# Altium PCB VGA-PCB.PcbDoc
Units mm, origin at the board's own origin, x right, y up, seen from the top; angles counter-clockwise.
Board outline 40 x 30 mm, 2 copper layers (Top Layer, Bottom Layer); 12 components, 16 nets, 48 pads, 9 vias.
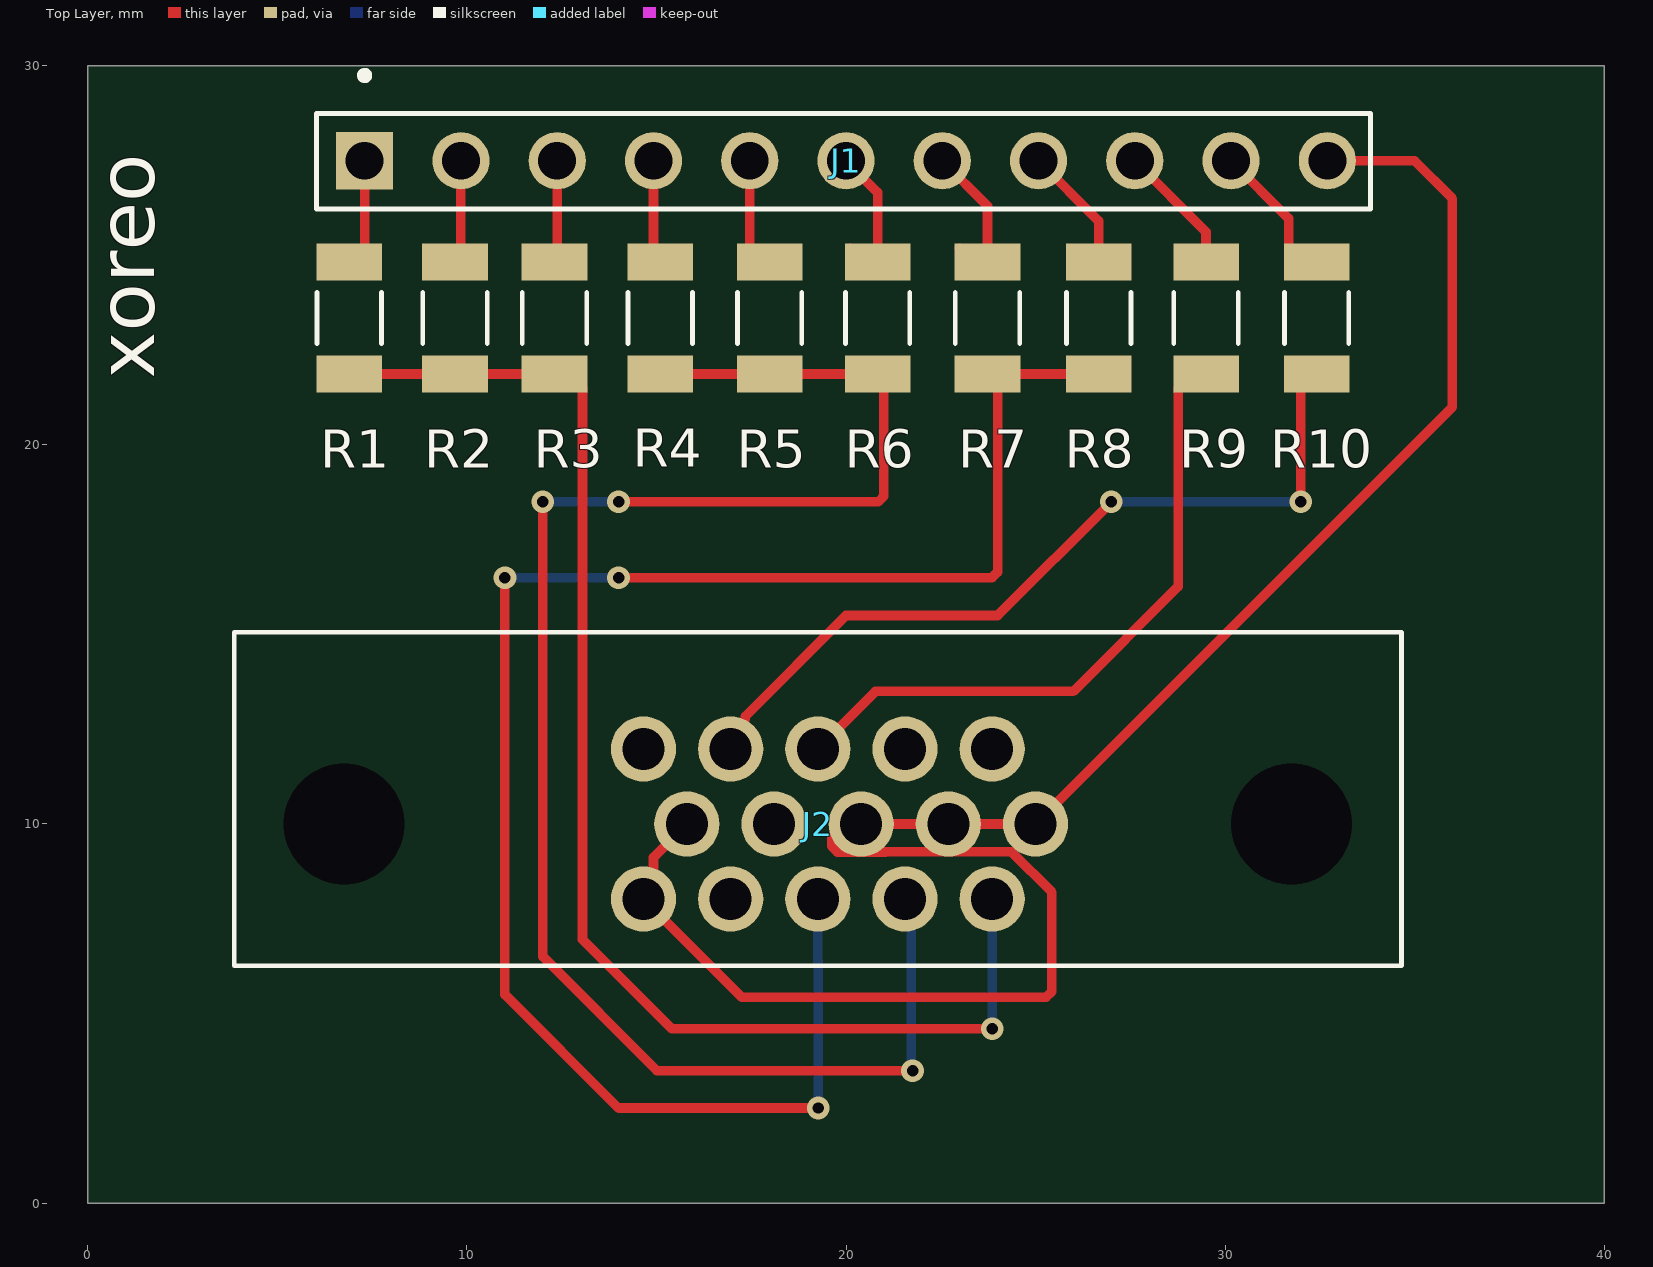
[diagram p0: Top Layer view]
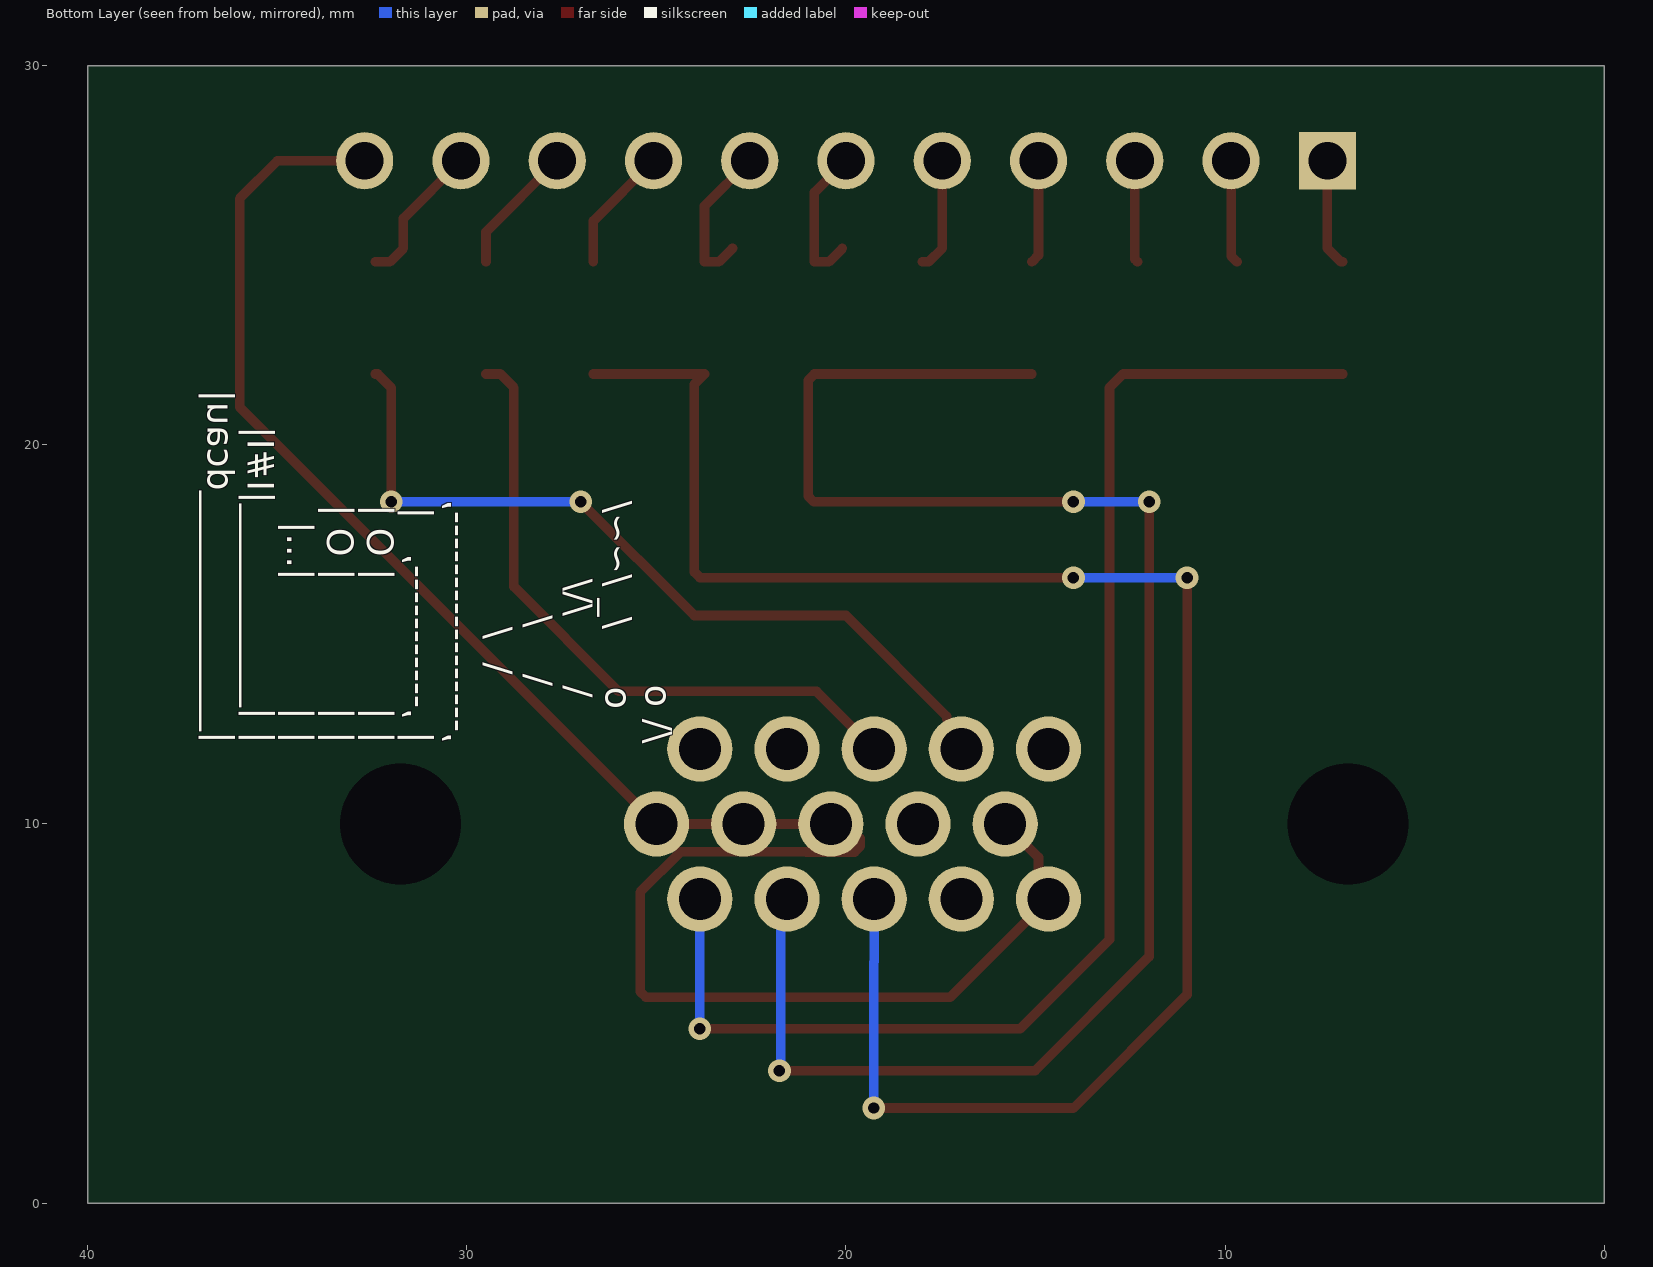
[diagram p1: Bottom Layer view, seen from below]
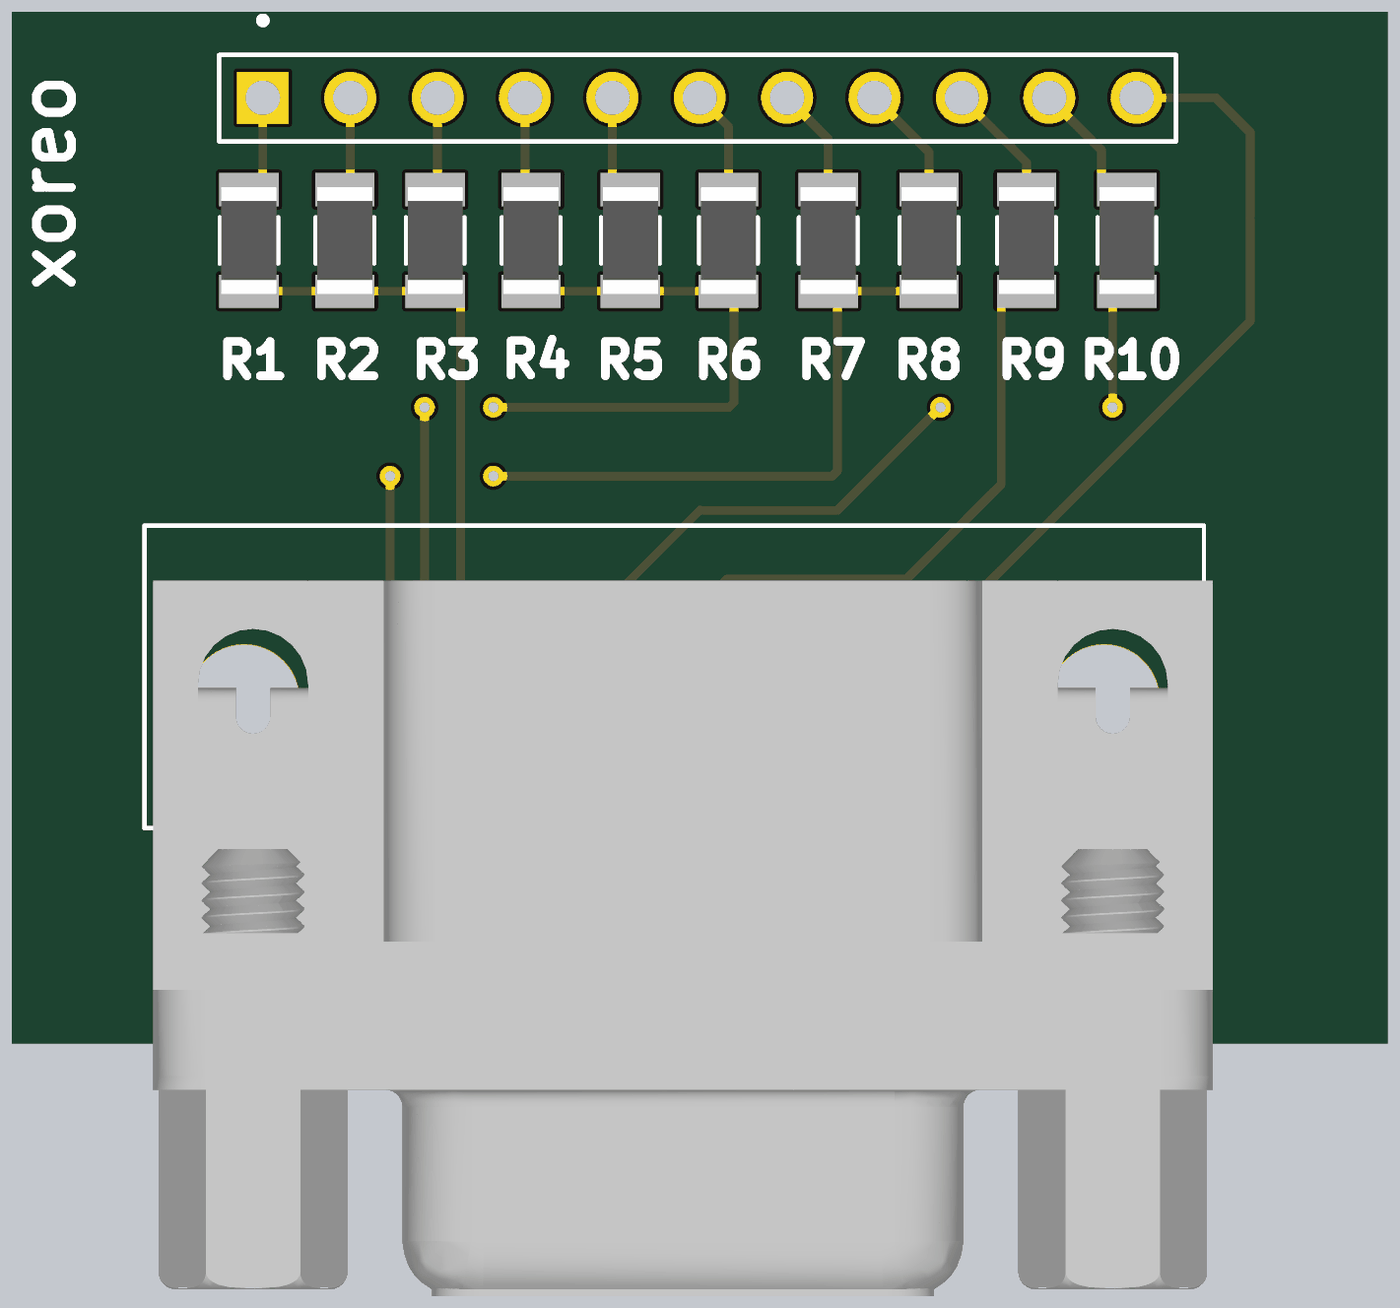
[diagram p2: 3D render of the assembled board from above, using the file's embedded part models]

## Layer stack, top to bottom
Top Solder: solder mask 0.0102, Solder Resist, Dk 3.5
Top Layer: signal copper 0.0356
Dielectric 1: dielectric 0.32, FR-4, Dk 4.8
Bottom Layer: signal copper 0.0356
Bottom Solder: solder mask 0.0102, Solder Resist, Dk 3.5

## Board outline
0,0 40,0 40,30 0,30

## Design rules (kind name [scope] priority, off if disabled: settings)
Clearance [All] p1: gap=0.254 ignorepadtopadclearanceinfootprint=FALSE except(0: Arc-Hole Track-Hole SMDPad-Hole THPad-Hole Via-Hole Fill-Hole Poly-Hole Region-Hole Text-Hole)
HoleSize [All] p1: absolutevalues=TRUE maxlimit=5 minlimit=0.025 maxpercent=80.000 minpercent=20.000
PolygonConnect [All] p1: connectstyle=Relief reliefconductorwidth=0.254 reliefentries=4 polygonreliefangle="90 Angle" airgapwidth=0.254
RoutingVias [All] p1: holewidth=0.711 width=1.27 viastyle="Through Hole" minholewidth=0.711 minwidth=1.27 maxholewidth=0.711 maxwidth=1.27
SolderMaskExpansion [All] p1: expansion=0.102 istentingtop=FALSE
Width [All] p1: maxlimit=0.254 minlimit=0.254 preferedwidth=0.254
29 further rules are at their usual default settings.

## Classes and differential pairs
component class VGA-SCH: J1 J2 R1 R2 R3 R4 R5 R6 R7 R8 R10

## Components (designator, comment, footprint, x,y, rotation, side; value= is the part's Value field where it differs from the comment)
J1 "VGA Pin HDR" "VGA HDR" 20,27.5 r0 top
J2 "Female DB15 VGA connector" "VGA CONNECTOR" 19.257,15.06 r180 top
R1 "2K" "Resistor 1206" 6.895,23.352 r270 top
R2 "1K" "Resistor 1206" 9.684,23.352 r270 top
R3 "510R" "Resistor 1206" 12.309,23.352 r270 top
R4 "2K" "Resistor 1206" 15.097,23.352 r270 top
R5 "1K" "Resistor 1206" 17.983,23.352 r270 top
R6 "510R" "Resistor 1206" 20.834,23.352 r270 top
R7 "1K" "Resistor 1206" 23.734,23.352 r270 top
R8 "510R" "Resistor 1206" 26.667,23.352 r270 top
R9 "200R" "Resistor 1206" 29.5,23.352 r270 top (schematic designator R10)
R10 "200R" "Resistor 1206" 32.417,23.352 r270 top (schematic designator R9)

## Footprints (in the part's own frame and the unit in brackets; to place one, negate y for a bottom-side part, rotate by r counter-clockwise, add the part's x,y. Pads: shape width x height; smd on the part's side, far side on the other; paste and mask are expansions set on the pad)
"Resistor 1206" [mm]
  rect 0.97x1.73 smd: 1(-1.48,0) 2(1.48,0)
  silkscreen extent -0.67,-0.85 0.67,0.85, body extent -1.55,-0.8 1.55,0.8, height 0.65
"VGA CONNECTOR" [mm]
  round 1.724 hole 1.11: 1(-4.6,7.04) 2(-2.3,7.04) 3(0,7.04) 4(2.3,7.04) 5(4.6,7.04) 6(-5.743,5.06) 7(-3.443,5.06) 8(-1.143,5.06) 9(1.157,5.06) 10(3.457,5.06) 11(-4.6,3.08) 12(-2.3,3.08) 13(0,3.08) 14(2.3,3.08) 15(4.6,3.08)
  round 0 hole 3.2: 17(-12.5,5.06) 17(12.5,5.06)
  silkscreen extent -15.4,0 15.4,8.8, body extent -15.66,1.6 15.15,22.4, height 12.77
"VGA HDR" [mm] "1x11 pin header"
  rect 1.508x1.508 hole 1: 1(-12.7,0)
  round 1.508 hole 1: 2(-10.16,0) 3(-7.62,0) 4(-5.08,0) 5(-2.54,0) 6(0,0) 7(2.54,0) 8(5.08,0) 9(7.62,0) 10(10.16,0) 11(12.7,0)
  silkscreen extent -13.97,-1.27 13.84,2.35

## Part data
J1: library part "Connector: VGA HDR", "VGA pin male header"
J2: library part "Connector: DB15 VGA"
R1 R4: library part "Resistor: 2K R", "Res Thick Film 1206 2K Ohm 1% 1/4W ±100ppm/°C Molded SMD SMD Paper T/R", Case Code (Imperial)=1206, Case Code (Metric)=3216, Manufacturer=Yageo, Manufacturer Part Number=RC1206FR-132KL, Max Operating Temperature=155°C, Min Operating Temperature=-55°C, Package Quantity=5000, Power Rating=250mW, Resistance=2kR, Resistor Type="Thick Film", Supplier Part Number 1=13-RC1206FR-132KL-ND, Temperature Coefficient=100ppm/°C, Tolerance=1%, Voltage Rating=200V, Case/Package=1206, Category="Chip SMD Resistors", ComponentLink1Description=https://datasheet.ciiva.com/16834/pyu-rc1206-51-rohs-l-4-16834793.pdf?src-supplier=Future+Electronics, ComponentLink1URL=https://datasheet.ciiva.com/16834/pyu-rc1206-51-rohs-l-4-16834793.pdf?src-supplier=Future+Electronics, Contact Plating=Tin,Matte, Height=0.55mm, Lead Free="Lead Free", Length=3.1mm, Packaging="Tape and Reel", Pricing 1="20000=0,00667 (USD)", Radiation Hardening=No, RoHS=Yes, RoHS Compliant=Yes, Series=RC, Size Code=1206, Supplier 1=Digi-Key, Termination=SMD/SMT, Width=1.6mm
R2 R5 R7: library part "Resistor: 1K R", "Res Thick Film 1206 1K Ohm 5% 1/4W ±100ppm/°C Molded SMD SMD Paper T/R", Case Code (Imperial)=1206, Case Code (Metric)=3216, Manufacturer=Yageo, Manufacturer Part Number=RC1206JR-131KL, Max Operating Temperature=155°C, Min Operating Temperature=-55°C, Power Rating=250mW, Resistance=1kR, Resistor Type="Thick Film", Supplier Part Number 1=603-RC1206JR-131KL, Temperature Coefficient=100ppm/°C, Tolerance=5%, Voltage Rating=200V, Case/Package=1206, Category="Chip SMD Resistors", ComponentLink1Description=http://www.mouser.com/ds/2/447/PYu-RC1206_51_RoHS_L-4-349080.pdf?src-supplier=Mouser, ComponentLink1URL=http://www.mouser.com/ds/2/447/PYu-RC1206_51_RoHS_L-4-349080.pdf?src-supplier=Mouser, ComponentLink2Description=http://www.yageo.com/documents/recent/PYu-RC1206_51_RoHS_L-4.pdf?src-supplier=Future+Electronics, ComponentLink2URL=http://www.yageo.com/documents/recent/PYu-RC1206_51_RoHS_L-4.pdf?src-supplier=Future+Electronics, ComponentLink3Description=http://www.yageo.com/documents/recent/PYu-RC1206_51_RoHS_L_v5.pdf?src-supplier=Avnet, ComponentLink3URL=http://www.yageo.com/documents/recent/PYu-RC1206_51_RoHS_L_v5.pdf?src-supplier=Avnet, Construction=Rectangular, Contact Plating=Tin,Matte, Depth=1.6mm, Lead Free="Lead Free", Length=3.1mm, Military Standard=Not, Packaging="Tape and Reel", Pricing 1="1=0,20000, 10=0,06700, 50=0,06700, 100=0,02800, 1000=0,01300, 10000=0,00800 (USD)", Radiation Hardening=No, RoHS=Yes, RoHS Compliant=Yes, Series=RC, Size Code=1206, Stock 1=38950, Supplier 1=Mouser, Termination=SMD/SMT
R3 R6 R8: library part "Resistor: 510R", "Res Thick Film 1206 510 Ohm 1% 1/4W ±100ppm/°C Molded SMD SMD Paper T/R", Case Code (Imperial)=1206, Case Code (Metric)=3216, Manufacturer="Vishay Dale", Manufacturer Part Number=CRCW1206510RFKEB, Max Operating Temperature=155°C, Max Power Dissipation=250mW, Min Operating Temperature=-55°C, Package Quantity=10000, Resistor Type="Thick Film", Supplier Part Number 1=CRCW1206510RFKEB-ND, Temperature Coefficient=100ppm/°C, Tolerance=1%, Voltage Rating=200V, Case/Package=1206, Category="Chip SMD Resistors", ComponentLink1Description=https://datasheet.ciiva.com/8931/dcrcwe3-8931628.pdf?src-supplier=Avnet, ComponentLink1URL=https://datasheet.ciiva.com/8931/dcrcwe3-8931628.pdf?src-supplier=Avnet, ComponentLink2Description=https://datasheet.ciiva.com/5583/dcrcwe3-109170-5583982.pdf?src-supplier=Mouser, ComponentLink2URL=https://datasheet.ciiva.com/5583/dcrcwe3-109170-5583982.pdf?src-supplier=Mouser, Contact Plating=Tin, Features="Automotive AEC-Q200", Height=0.024inch, Lead Free="Lead Free", Length=0.126inch, Number of Terminations=2, Packaging="Tape and Reel", Power Rating=250mW, Pricing 1="20000=0,00965 (USD)", Radiation Hardening=No, Resistance=510R, RoHS=Yes, RoHS Compliant=Yes, Series=CRCW, Supplier 1=Digi-Key, Termination=SMD/SMT, Weight=0.000353oz, Width=0.063inch
R9 R10: library part "Resistor: 200R", "Surface Mount Thick Film Resistor, AEC-Q200 ERJ Series, 200 ohm, 250 mW, - 1%, 200 V", Case Code (Imperial)=1206, Case Code (Metric)=3216, Current Rating=2A, Manufacturer=Panasonic, Manufacturer Part Number=ERJ-U08F2000V, Max Operating Temperature=155°C, Min Operating Temperature=-55°C, Package Quantity=5000, Power Rating=250mW, Resistance Tolerance=1%, Resistor Type="Thick Film", Supplier Part Number 1=1723988, Temperature Coefficient=100ppm/°C, Voltage Rating=200V, Case/Package=1206, Category="Chip SMD Resistors", ComponentLink1Description=https://datasheet.ciiva.com/7891/1638979-7891542.pdf?src-supplier=Element14, ComponentLink1URL=https://datasheet.ciiva.com/7891/1638979-7891542.pdf?src-supplier=Element14, ComponentLink2Description=https://datasheet.ciiva.com/24195/ras-erj-u-267552-24195551.pdf?src-supplier=Mouser, ComponentLink2URL=https://datasheet.ciiva.com/24195/ras-erj-u-267552-24195551.pdf?src-supplier=Mouser, Depth=1.6mm, Height=0.6mm, Length=3.2mm, Packaging="Tape and Reel", Pricing 1="4000=0,04900 (EUR)", Reach SVHC Compliant=Yes, Resistance=200R, RoHS=Yes, RoHS Compliant=Yes, Series=ERJ-U08, Stock 1=6900, Supplier 1=Rs, Technology="THICK FILM", Termination=SMD/SMT, Tolerance=1%, Voltage Rating (DC)=200V, Weight=0.000571oz, Width=1.6mm

## Via types
v1: diameter 0.6, hole 0.3, Top Layer to Bottom Layer, 9 vias

## Nets (pads, with @x,y where several pads share a name; then routed paths per layer and width w, separated by ;. In a path a pad name is that pad's centre, name@x,y a point inside that pad or via, vN(x,y) a via of type N, cw(c..) or ccw(c..) an arc to the next point about the centre after c; other vN are vias at no path point)
GND: J1.11 J2.5 J2.6 J2.7 J2.8 J2.10 | length 53.8
  Top Layer w0.254: J2.10 14.921,9.121 14.921,8.284 J2.5 17.245,5.432 25.283,5.432 25.432,5.581 25.432,8.203 24.372,9.263 21.042,9.263 ; 21.041,9.262 19.773,9.262 19.624,9.411 19.624,9.622 20.002,10 J2.8 J2.7 J2.6 36,21 36,26.5 35,27.5 J1.11
NetJ1_1: J1.1 R1.1 | length 2.9
  Top Layer w0.254: R1.1 6.942,24.832 7.3,25.19 J1.1
NetJ1_2: J1.2 R2.1 | length 2.7
  Top Layer w0.254: R2.1 9.84,24.988 J1.2
NetJ1_3: J1.3 R3.1 | length 2.7
  Top Layer w0.254: R3.1 12.38,24.903 J1.3
NetJ1_4: J1.4 R4.1 | length 2.7
  Top Layer w0.254: J1.4 14.92,25.008 R4.1
NetJ1_5: J1.5 R5.1 | length 3
  Top Layer w0.254: J1.5 17.46,25.19 17.818,24.832 R5.1
NetJ1_6: J1.6 R6.1 | length 3.9
  Top Layer w0.254: J1.6 20.834,26.666 R6.1 20.454,24.832 R6.1@20.096,25.19
NetJ1_7: J1.7 R7.1 | length 4.4
  Top Layer w0.254: J1.7@22.54,27.161 J1.7 23.734,26.306 R7.1 23.354,24.832 R7.1@22.996,25.19
NetJ1_8: J1.8 R8.1 | length 3.3
  Top Layer w0.254: J1.8 26.667,25.913 R8.1
NetJ1_9: J1.9 R9.1 | length 3.4
  Top Layer w0.254: J1.9 29.5,25.62 R9.1
NetJ1_10: J1.10 R10.1 | length 3.8
  Top Layer w0.254: J1.10 31.679,25.981 31.679,25.19 32.037,24.832 R10.1
NetJ2_1: J2.1 R1.2 R2.2 R3.2 | length 36.1
  Top Layer w0.254: R1.2 R2.2 R3.2 12.689,21.872 13.047,21.514 13.047,6.953 15.4,4.6 v1(23.861,4.6) ; J2.1 J2.1
  Bottom Layer w0.254: J2.1 J2.1 23.859,4.602 v1(23.861,4.6)
NetJ2_2: J2.2 R4.2 R5.2 R6.2 | length 45.7
  Top Layer w0.254: v1(12,18.5) 12,6.5 15.01,3.49 v1(21.758,3.49) ; v1(14,18.5) 20.851,18.5 21,18.649 21,21.706 R6.2 R5.2 R4.2
  Bottom Layer w0.254: v1(12,18.5) v1(14,18.5) ; J2.2 J2.2@21.624,7.953 ; J2.2@21.724,8.02 21.724,3.523 v1(21.758,3.49)
NetJ2_3: J2.3 R7.2 R8.2 | length 47.4
  Top Layer w0.254: v1(11,16.5) 11,5.5 14,2.5 14.006,2.506 v1(19.265,2.506) ; v1(14,16.5) 23.851,16.5 24,16.649 24,21.605 R7.2 R8.2
  Bottom Layer w0.254: v1(11,16.5) v1(14,16.5) ; J2.3 19.257,6.368 19.265,6.36 v1(19.265,2.506)
NetJ2_13: J2.13 R9.2 | length 17.4
  Top Layer w0.254: J2.13 20.777,13.5 26,13.5 28.762,16.262 28.762,21.514 29.12,21.872 R9.2
NetJ2_14: J2.14 R10.2 | length 21.6
  Top Layer w0.254: J2.14 16.957,12.378 17.343,12.764 17.343,12.843 20.009,15.509 ; 20,15.5 24,15.5 v1(27,18.5) ; v1(32,18.5) 32,21.514 32.358,21.872 R10.2
  Bottom Layer w0.254: v1(27,18.5) v1(32,18.5)
pads on no net: J2.4 J2.9 J2.11 J2.12 J2.15 J2.17

## Silkscreen, mask and mechanical layers (free items; w line width, h text height)
Top Overlay:
  text "xoreo" at 1.746,21.754 h1.52 r90
Bottom Overlay:
  text "/\ o  /    o     /_ /~~/ /     \      /\/ /      \    /    /       \  /    / ,-----------------, / | ,-----------,   | / | |           | O | / | |           | O | / | |           |...| / | |___________|I#I| / |_____________dcau|" at 36.837,12.123 h0.7 r90
Board Outline:
  the board outline again, w0.2